# EAGLE board E_KEYPAD__2_1 (EAGLE 6.4)
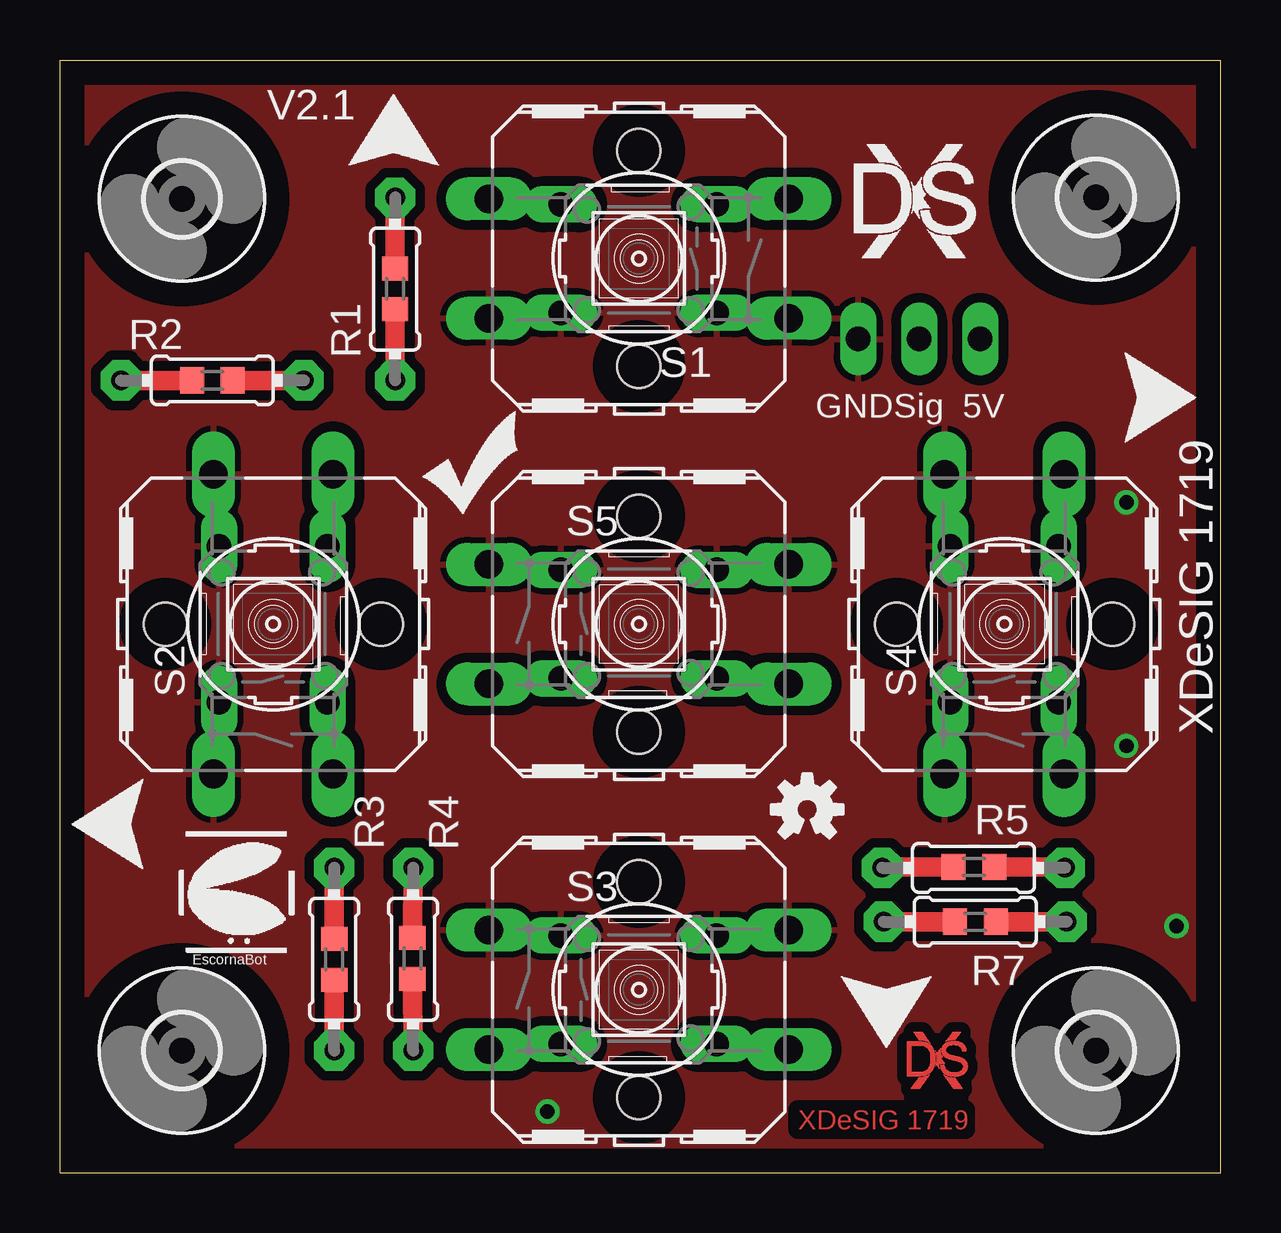
[diagram p0: board, top side]
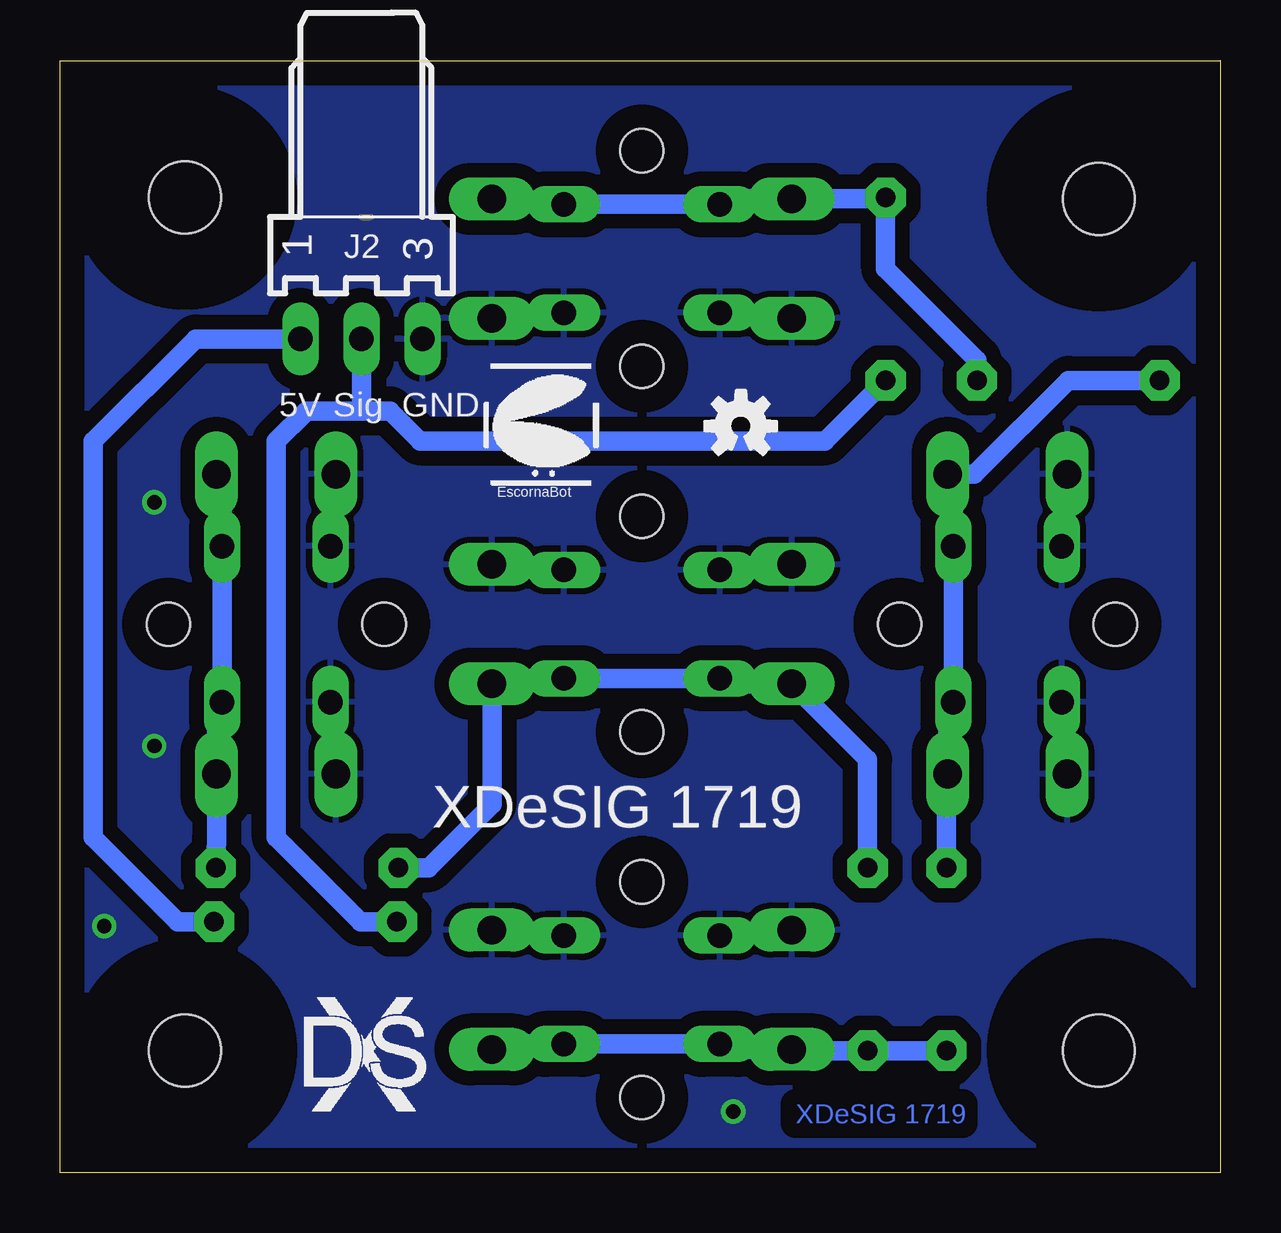
[diagram p1: board, bottom side, seen from below]

Size 48.38 x 46.38 mm. Coordinates in mm from the lower left corner, seen from the top.
Outline: 0,46.34 48.38,46.34 48.38,0 0,0 0,46.38
Copper layers (1*16): Top 0.035mm / dielectric 1.5mm / Bottom 0.035mm
Design rules "default": minimum track width 10mil, minimum drill 24mil, track to track 8mil, track to pad 8mil, pad to pad 8mil, via to via 8mil, smd to smd 8mil, copper to edge 40mil, drill to drill 8mil, minimum pad ring 10mil, minimum via ring 8mil, stop-mask expansion 4mil, vias tented up to drill 0mil, thermal gap 10mil
Net classes: 0 default: clearance 0.355 mm

## Footprints (pad centres in the part's own frame; a part is rotated, then mirrored left to right if it is on the bottom)
3,0 = hole 3: 0,0
7395-03 = drill 1.016 long: 1 2.54,0; 2 0,0; 3 -2.54,0
0204/7 = drill 0.813 pad 1.676 octagon: 1 -3.81,0; 2 3.81,0
R0603 = smd 1 x 1.1: 1 -0.85,0; 2 0.85,0
B3F-10XX = drill 1.016 long: 1 -3.251,2.261; 2 3.251,2.261; 3 -3.251,-2.261; 4 3.251,-2.261
B3F-40XX = drill 1.194 long: 1 -6.248,2.489; 2 6.248,2.489; 3 -6.248,-2.489; 4 6.248,-2.489 | hole 1.803: 0,-4.496; 0,4.496

## Placement (x,y rotation side)
H1  HOLE3.0  [3,0]  5.08,40.59 0 top
H2  HOLE3.0  [3,0]  43.18,5.08 0 top
H3  HOLE3.0  [3,0]  5.08,5.08 0 top
H4  HOLE3.0  [3,0]  43.18,40.64 0 top
J2  22-05-7038-03  [7395-03]  35.81,34.74 180 bottom
LOGO1  OSHW-LOGOS  [OSHW-LOGO-S]  31.14,15.13 0 top
LOGO2  OSHW-LOGOS  [OSHW-LOGO-S]  20,31.11 0 bottom
R1  10K  [0204/7]  13.97,36.83 270 top
R1.1  10K  [R0603]  13.97,36.83 270 top
R2  10K  [0204/7]  6.35,33.02 0 top
R2.1  10K  [R0603]  6.35,33.02 0 top
R3  10K  [0204/7]  11.43,8.89 90 top
R3.1  10K  [R0603]  11.43,8.89 90 top
R4  10K  [0204/7]  14.72,8.89 270 top
R4.1  10K  [R0603]  14.7,8.93 270 top
R5  22K  [0204/7]  38.08,12.7 180 top
R5.1  22K  [R0603]  38.09,12.74 180 top
R7  10K  [0204/7]  38.15,10.46 180 top
R7.1  10K  [R0603]  38.15,10.46 180 top
S1  [B3F-10XX]  24.13,38.1 180 top
S1.1  [B3F-40XX]  24.13,38.1 180 top
S2  [B3F-10XX]  8.89,22.86 90 top
S2.1  [B3F-40XX]  8.89,22.86 90 top
S3  [B3F-10XX]  24.13,7.62 0 top
S3.1  [B3F-40XX]  24.13,7.62 0 top
S4  [B3F-10XX]  39.37,22.86 90 top
S4.1  [B3F-40XX]  39.37,22.86 90 top
S5  [B3F-10XX]  24.13,22.86 0 top
S5.1  [B3F-40XX]  24.13,22.86 0 top
U$1  ESCORNABOT  [ESCORNA_PEQUE]  30.8,28.57 0 bottom
U$2  ESCORNABOT  [ESCORNA_PEQUE]  4.89,9.08 0 top
U$3  FRECHA  [FRECHA]  3.5,16.45 180 top
U$4  FRECHA  [FRECHA]  15.83,41.95 90 top
U$5  GO  [VALE]  15.07,27.41 0 top
U$6  FRECHA  [FRECHA]  32.52,8.21 270 top
U$7  XDESIG21  [XDESIG]  38.19,2.56 0 bottom
U$8  XDESIG  [XDESIG_CU_2]  35.3,3.5 0 top
U$9  XDESIG21  [XDESIG]  33.11,38.12 0 top
U$11  FRECHA  [FRECHA]  44.34,30.38 0 top

## Library data of the parts
H1-H4 = holes
J2 = con-molex; OC_FARNELL: unknown; OC_NEWARK: unknown
LOGO1 LOGO2 = SparkFun-Aesthetics
R1 R1.1 R2 R2.1 R3 R3.1 R4 R4.1 R5 R5.1 R7 R7.1 = rcl
S1-S5 = switch-omron; MPN: B3F-1000; OC_FARNELL: 176432; OC_NEWARK: 36M3542
S1.1 S2.1 S3.1 S4.1 S5.1 = switch-omron; MF: OMRON COMPONENTS USA; MPN: B3F-4000; OC_FARNELL: 176434; OC_NEWARK: 36K3105
U$1-U$6 U$11 = escorna
U$7-U$9 = xdesig

## Nets
5V: J2.1 R7.1 R7.1.1
GND: J2.3 S1.1 S1.1.1 S1.1.2 S1.2 S2.1 S2.1.1 S2.1.2 S2.2 S3.1 S3.1.1 S3.1.2 S3.2 S4.1 S4.1.1 S4.1.2 S4.2 S5.1 S5.1.1 S5.1.2 S5.2
S1: R1.1 R1.1.1 R2.1.2 R2.2 S1.1.3 S1.1.4 S1.3 S1.4
S2: R2.1 R2.1.1 R3.1.2 R3.2 S2.1.3 S2.1.4 S2.3 S2.4
S3: R3.1 R3.1.1 R4.1.2 R4.2 S3.1.3 S3.1.4 S3.3 S3.4
S4: R5.1 R5.1.1 S4.1.3 S4.1.4 S4.3 S4.4
S5: R4.1 R4.1.1 R5.1.2 R5.2 S5.1.3 S5.1.4 S5.3 S5.4
SIG: J2.2 R1.1.2 R1.2 R7.1.2 R7.2

## Tracks (layer width: path | path; a pad name or v marks a point on that pad's centre or on a via)
5V
  Top 0.813: R7.1.1 R7.1
  Bottom 0.813: J2.1 42.73,34.74 46.99,30.48 46.99,13.97 43.48,10.46 R7.1
GND  (via drill 0.6)
  other vias: 44.45,27.94 44.45,17.78 20.32,2.54 46.54,10.27
  pour Bottom (isolate 0.61): 0,46.99 50.8,46.99 50.8,0 0,0
  pour Top (isolate 0.406): -1.27,46.99 49.53,46.99 49.53,-1.27 -1.27,-1.27
S1
  Top 0.813: R2.1.2 R2.2 | R1.1.1 R1.1
  Bottom 0.813: R2.2 10.16,33.87 R1.1.1 R1.1 14.02,40.59 S1.1.4 20.65,40.59 S1.4 S1.3 30.15,40.36 S1.1.3
S2
  Top 0.813: R3.1.2 R3.2 | R2.1.1 R2.1
  Bottom 0.813: R3.2 11.43,16.56 S2.1.3 11.38,19.38 S2.3 S2.4 11.15,28.88 S2.1.4 10.26,29.11 6.35,33.02 R2.1
S3
  Top 0.813: R4.1.2 R4.2 | R3.1.1 R3.1
  Bottom 0.813: R3.1 R4.2 17.83,5.08 S3.1.3 20.65,5.13 S3.3 S3.4 30.15,5.36 S3.1.4
S4
  Top 0.813: R5.1.1 41.73,12.74 R5.1
  Bottom 0.813: R5.1 41.86,13.92 S4.1.3 41.86,19.38 S4.3 S4.4 41.63,28.88 S4.1.4
S5
  Top 0.813: R5.1.2 34.19,12.74 R5.2 | R4.1.1 R4.1
  Bottom 0.813: R5.2 33.02,12.7 30.38,15.34 S5.1.4 30.15,20.6 S5.4 S5.3 20.65,20.37 S5.1.3 14.72,17.21 R4.1
SIG
  Top 0.813: R7.1.2 R7.2 | R1.1.2 R1.2
  Bottom 0.813: 34.2,10.07 R7.2 35.85,10.46 39.37,13.97 39.37,30.48 38.1,31.75 35.56,31.75 | 35.56,31.75 34.62,31.75 33.38,30.5 16.49,30.5 R1.2 | J2.2 35.81,32.01 35.56,31.75

## Text on the board
Top: XDeSIG 1719
Bottom: XDeSIG 1719
tPlace: V2.1 | GND | Sig | 5V | XDeSIG 1719
bPlace: GND | Sig | 5V | XDeSIG 1719
Measures: Creative commons. Attribution-ShareAlike 4.0 / International (CC BY-SA 4.0)
Document: Creative Commons Recoñecemento 4.0 Internacional (CC BY 4.0)